# Altium PCB Test.PcbDoc
Units mm, origin at the board's own origin, x right, y up, seen from the top; angles counter-clockwise.
Board outline 152.4 x 101.6 mm, 2 copper layers (Top Layer, Bottom Layer); 91 components, 36 nets, 220 pads, 1 vias.
Unrouted connection lines stored in the file: 103.
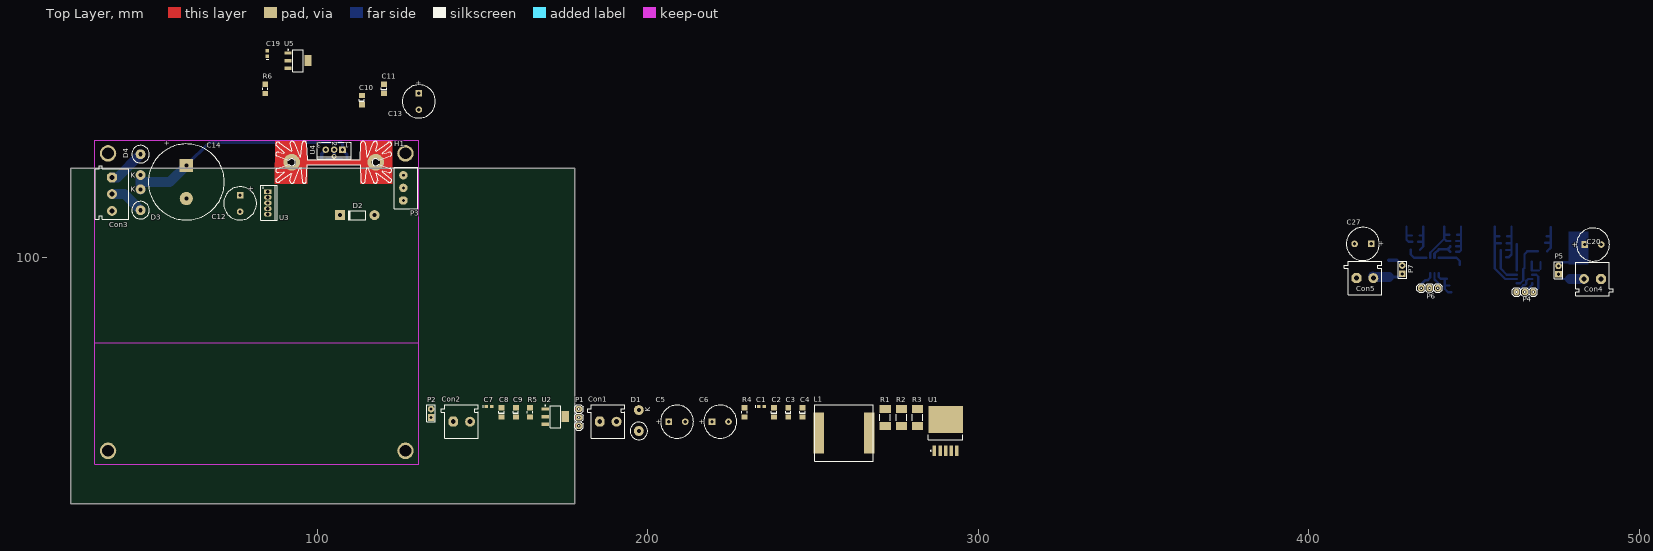
[diagram p0: Top Layer view]
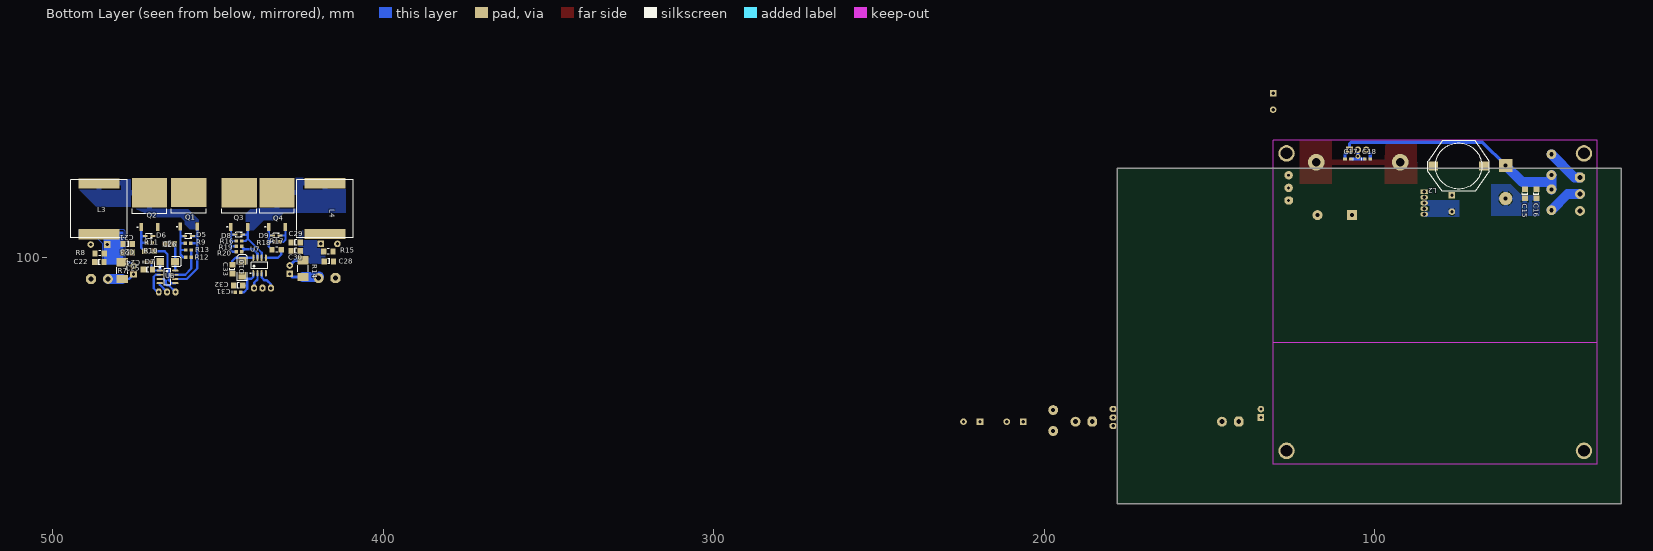
[diagram p1: Bottom Layer view, seen from below]

## Layer stack, top to bottom
Top Solder: solder mask 0.0102, Solder Resist, Dk 3.5
Top Layer: signal copper 0.0356
Dielectric 1: dielectric 0.32, FR-4, Dk 4.8
Bottom Layer: signal copper 0.0356
Bottom Solder: solder mask 0.0102, Solder Resist, Dk 3.5

## Board outline
25.4,25.4 177.8,25.4 177.8,127 25.4,127

## Design rules (kind name [scope] priority, off if disabled: settings)
Clearance "Polygon Clearance" [InPolygon AND (Not(OnLayer('Keep-Out Layer'))) vs All AND (Not(OnLayer('Keep-Out Layer')))] p1: gap=0.25
Clearance [All AND (Not(OnLayer('Keep-Out Layer'))) vs All AND (Not(OnLayer('Keep-Out Layer')))] p2: gap=0.16
ComponentClearance [All] p1 off: gap=0.5 collisioncheckmode=3 verticalgap=0.254 showdistances=TRUE
Height [All] p1: minheight=0 maxheight=80 prefheight=12.7
MinimumSolderMaskSliver SilkscreenOverComponentPads [All] p2: minsoldermaskwidth=0.254
PlaneConnect [All] p1: planeconnectstyle=Relief reliefexpansion=0.508 reliefentries=4 reliefconductorwidth=0.7 reliefairgap=0.6
PolygonConnect [All] p1: connectstyle=Relief reliefconductorwidth=1.5 reliefentries=4 polygonreliefangle="90 Angle" airgapwidth=0.3
RoomDefinition "Variable Output 2" [InComponentClass('Variable Output 2')] p1: confinementstyle=ConfineIn formatcopy=TRUE lockcomponents=FALSE outline 450.947,87.956 450.947,124.968 407.165,124.968 407.165,87.956
RoomDefinition "Variable Output 1" [InComponentClass('Variable Output 1')] p2: confinementstyle=ConfineIn formatcopy=TRUE lockcomponents=FALSE outline 452.247,88.011 495.173,88.011 495.173,124.714 452.247,124.714
RoomDefinition Regulators [InComponentClass('Regulators')] p3: confinementstyle=ConfineIn formatcopy=TRUE lockcomponents=FALSE outline 51.8,150.749 149.8,150.749 149.8,175.26 51.8,175.26
RoomDefinition "5V and 3V3 Outputs" [InComponentClass('5V and 3V3 Outputs')] p4: confinementstyle=ConfineIn formatcopy=TRUE lockcomponents=FALSE outline 152.019,77.851 314.96,77.851 314.96,97.917 152.019,97.917
RoutingVias [All] p1: holewidth=0.5 width=1.5 viastyle="Through Hole" minholewidth=0.3 minwidth=1 maxholewidth=1.25 maxwidth=3
SolderMaskExpansion [All] p1: expansion=0.102
Width [All] p1: maxlimit=8 minlimit=0.16 preferedwidth=1
27 further rules are at their usual default settings.

## Classes and differential pairs
component class "5V and 3V3 Outputs": C1 C2 C3 C4 C5 C6 C7 C8 C9 Con1 Con2 D1 L1 P1 P2 R1 R2 R3 R4 R5 U1 U2
component class Regulators: C10 C11 C12 C13 C14 C15 C16 C17 C18 C19 Con3 D2 D3 D4 H1 L2 P3 R6 U3 U4 U5
component class "Variable Output 1": C20 C21 C22 C23 C24 C25 C26 Con4 D5 D6 D7 L3 P4 P5 Q1 Q2 R7 R8 R9 R10 R11 R12 R13 U6
component class "Variable Output 2": C27 C28 C29 C30 C31 C32 C33 Con5 D8 D9 D10 L4 P6 P7 Q3 Q4 R14 R15 R16 R17 R18 R19 R20 U7

## Components (designator, comment, footprint, x,y, rotation, side; value= is the part's Value field where it differs from the comment)
C1 "C0603" 0603 234.315,54.864 r0 top
C2 "SMD" 1206 238.125,53.086 r90 top
C3 "SMD" 1206 242.443,53.086 r90 top
C4 "SMD" 1206 246.761,53.086 r90 top
C5 "220uF" CAPPR5-10X16 208.788,50.292 r0 top
C6 "470uF HF" CAPPR5-10X20 221.869,50.292 r0 top
C7 "C0603" 0603 151.892,54.864 r0 top
C8 "SMD" 1206 155.702,53.086 r90 top
C9 "SMD" 1206 160.02,53.086 r90 top
C10 "SMD" 1206 113.411,147.574 r90 top
C11 "SMD" 1206 120.142,151.003 r90 top
C12 "220uF" CAPPR5-10X16 76.581,116.332 r270 top
C13 "470uF HF" CAPPR5-10X20 130.683,147.193 r270 top
C14 "Generic Electrolytic Capacitor" "Capacitor 23x48 (DxH)" 60.325,122.809 r90 top
C15 "SMD" 1206 54.483,119.253 r90 bottom
C16 "SMD" 1206 51.054,119.253 r90 bottom
C17 "C0603" 0603 108.077,129.794 r0 bottom
C18 "C0603" 0603 102.108,129.794 r180 bottom
C19 "C0603" 0603 84.836,161.671 r90 top
C20 "50V" CAPPR5-10X20 485.934,103.886 r0 top
C21 "SMD" 1206 477.266,104.013 r0 bottom
C22 "SMD" 1206 485.807,98.552 r180 bottom
C23 "SMD" 1206 477.266,101.473 r0 bottom
C24 "C0603" 0603 470.916,98.552 r180 bottom
C25 "SMD" 1206 471.17,96.266 r180 bottom
C26 "SMD" 1206 464.566,104.013 r180 bottom
C27 "50V" CAPPR5-10X20 416.306,104.085 r180 top
C28 "SMD" 1206 416.403,98.815 r0 bottom
C29 "SMD" 1206 426.466,104.521 r180 bottom
C30 "SMD" 1206 426.466,101.981 r180 bottom
C31 "C0603" 0603 443.865,89.48 r180 bottom
C32 "SMD" 1206 443.865,91.512 r180 bottom
C33 "SMD" 1206 445.613,96.405 r90 bottom
Con1 "Salida Buck" My_CN2 182.88,55.372 r0 top
Con2 "Salida Buck" My_CN2 138.557,55.372 r0 top
Con3 "AC Input" My_CN3 42.926,126.746 r270 top
Con4 "Salida Buck" My_CN2 490.855,88.392 r180 top
Con5 "Salida Buck" My_CN2 411.861,98.806 r0 top
D1 "1N5822" "Vertical DO-201AD" 197.231,50.292 r90 top
D2 "1N5817" DO-41 112.014,112.776 r180 top
D3 "1N5408" "Vertical DO-201AD" 46.482,117.094 r90 top
D4 "1N5408" "Vertical DO-201AD" 46.482,128.397 r270 top
D5 "15V Zener" SOD323 458.851,106.426 r180 bottom
D6 "15V Zener" SOD323 470.789,106.426 r180 bottom
D7 "MBRS1100T3G" SMB 465.201,98.679 r180 bottom
D8 "15V Zener" SOD323 443.614,106.879 r180 bottom
D9 "15V Zener" SOD323 432.311,106.625 r180 bottom
D10 "MBRS1100T3G" SMB 442.565,96.659 r90 bottom
H1 "Heat sink TO22" My_Heat_sink_TO22 104.902,129.54 r0 top
L1 "Ferrite Inductor" "SRP1770TA Series" 259.334,46.863 r0 top
L2 "SMTDR1206" "SMTDR1206 Inductor" 74.549,127.635 r180 bottom
L3 "Ferrite Inductor" "SRP1770TA Series" 485.934,114.681 r270 bottom
L4 "Ferrite Inductor" "SRP1770TA Series" 417.576,114.753 r270 bottom
P1 "Header 3" My_1X03 179.07,51.562 r90 top
P2 "Header 2" HDR1X2 134.366,51.562 r90 top
P3 "XY2500R-F 3P" OSTOQ033250 125.984,121.031 r90 top
P4 "Header 3" My_1X03 465.328,89.535 r180 top
P5 "Header 2" HDR1X2 475.488,94.869 r90 top
P6 "Header 3" My_1X03 436.469,90.69 r180 top
P7 "Header 2" HDR1X2 428.244,94.996 r90 top
Q1 "SUM110P06" D2PAK_N 458.756,116.078 r90 bottom
Q2 "SUM110P06" D2PAK_N 470.662,115.951 r90 bottom
Q3 "SUM110P06" D2PAK_N 443.487,116.023 r90 bottom
Q4 "SUM110P06" D2PAK_N 432.057,116.023 r90 bottom
R1 "ERJL1W" L1W-2512 271.78,51.562 r90 top
R2 "ERJL1W" L1W-2512 276.733,51.562 r90 top
R3 "ERJL1W" L1W-2512 281.559,51.562 r90 top
R4 "SMD" 8RB-1206 229.235,53.086 r90 top
R5 "SMD" 8RB-1206 164.338,53.086 r90 top
R6 "SMD" 8RB-1206 84.201,151.003 r90 top
R7 "ERJL1W" L1W-2512 478.917,96.012 r270 bottom
R8 "SMD" 8RB-1206 485.775,101.219 r180 bottom
R9 "10K" ERA-0603 458.978,104.267 r180 bottom
R10 "SMD 1206" 8RB-1206 470.662,101.854 r180 bottom
R11 "10K" ERA-0603 470.662,104.394 r0 bottom
R12 "10" ERA-0603 458.851,100.076 r0 bottom
R13 "10" ERA-0603 458.851,102.235 r0 bottom
R14 "ERJL1W" L1W-2512 424.18,96.592 r270 bottom
R15 "SMD" 8RB-1206 416.53,101.736 r0 bottom
R16 "10K" ERA-0603 443.614,104.978 r180 bottom
R17 "SMD 1206" 8RB-1206 432.184,102.307 r180 bottom
R18 "10K" ERA-0603 432.184,104.72 r0 bottom
R19 "10" ERA-0603 443.614,103.325 r0 bottom
R20 "10" ERA-0603 443.614,101.672 r0 bottom
U1 "LM2576S-5.0" TS5B_N 290.068,47.498 r90 top
U2 "TC1262-3.3VDB" SOT-223-DB3_N 171.958,51.816 r0 top
U3 "LM2575T-5.0" T05A 84.963,116.459 r270 top
U4 "MC7815ACT" 221A-04 105.029,132.588 r180 top
U5 "TC1262-3.3VDB" SOT-223-DB3_N 94.107,159.512 r0 top
U6 "IRS21867S" SOIC8 465.201,94.107 r180 bottom
U7 "IRS21867S" SOIC8 437.358,97.548 r90 bottom

## Footprints (in the part's own frame and the unit in brackets; to place one, negate y for a bottom-side part, rotate by r counter-clockwise, add the part's x,y. Pads: shape width x height; smd on the part's side, far side on the other; paste and mask are expansions set on the pad)
8RB-1206 [mm] "Chip Resistor; Body 3.2 x 1.6 mm (LxW typ)"
  rect 1.6x1.8 smd: 1(-1.4,0) 2(1.4,0)
  silkscreen extent -0.3,-0.8 0.3,0.8
221A-04 [mm] "TO, Thru-Hole, Vertical, Heatsink Mounted; 3 In-Line Leads; Pitch 2.54 mm"
  rect 2x2 hole 1: 1(-2.54,0)
  round 2 hole 1: 2(0,0) 3(2.54,0)
  silkscreen extent -5.15,-2.2 5.15,2.7
0603 [mm] "Chip Capacitor; Body 1.6 x 0.8 mm (LxW typ)"
  rect 1.1x1 smd: 1(-0.85,0) 2(0.85,0)
  silkscreen extent -1.7,-0.4 -1.7,0.4
1206 [mm] "Chip Capacitor; Body 3.2 x 1.6 mm (LxW typ)"
  rect 1.6x1.8 smd: 1(-1.4,0) 2(1.4,0)
  silkscreen extent -0.3,-0.8 0.3,0.8
"Capacitor 23x48 (DxH)" [mm] "Electrolytic Capacitor 23x48 (DxH)"
  rect 4x4 hole 1.25: 1(5,0)
  round 4 hole 1.25: 2(-5,0)
  silkscreen extent -11.5,-11.5 11.5,11.5
CAPPR5-10X16 [mm] "Capacitor, Electrolytic, Radial; Body 10 x 16 mm (Dia.xH typ); Pin Spacing 5 mm (typ)"
  rect 2x2 hole 1: 1(-2.5,0)
  round 2 hole 1: 2(2.5,0)
  silkscreen extent -5,-5 5,5
CAPPR5-10X20 [mm] "Capacitor, Electrolytic, Radial; Body 10 x 20 mm (Dia.xH typ); Pin Spacing 5 mm (typ)"
  rect 2x2 hole 1: 1(-2.5,0)
  round 2 hole 1: 2(2.5,0)
  silkscreen extent -5,-5 5,5
D2PAK_N [mm] "D2-PAK, 4-Leads, Body 8.8x10.4mm, Pitch 2.54mm, Lead Span 15.1mm, IPC Medium Density"
  rect 2.4x1.05 smd: 1(-6.8,2.54) 3(-6.8,-2.54)
  rect 8.9x10.65 smd: 2(3.55,0)
  silkscreen extent -6.92,-5.25 -1.3,5.25, body extent -2.7,-5.28 6.3,5.28, height 4.69
DO-41 [mm] "Diode, Axial; Body 5.2 x 2.7 mm (LxDia. max), Lead Dia. 0.86 mm (max)"
  round 3 hole 1.25: 1(-5.23,0)
  rect 3x3 hole 1.25: 2(5.23,0)
  silkscreen extent -2.65,-1.4 2.75,1.4
ERA-0603 [mm] "Chip Resistor; Body 1.6 x 0.8 mm (LxW typ)"
  rect 1.1x1 smd: 1(-0.85,0) 2(0.85,0)
HDR1X2 [mm] "Connector; Header; 2 Position"
  rect 2x2 hole 1: 1(0,0)
  round 2 hole 1: 2(2.54,0)
  silkscreen extent -1.27,-1.27 3.81,1.27
L1W-2512 [mm] "Chip Resistor; Body 6.4 x 3.2 mm (LxW typ)"
  rect 2.5x3.4 smd: 1(-2.55,0) 2(2.55,0)
  silkscreen extent -1,-1.6 1,1.6
My_1X03 [mm]
  oct 1.8x2.1 hole 1: 1(-2.54,0) 2(0,0) 3(2.54,0)
  silkscreen extent -3.81,-1.27 3.81,1.27
My_CN2 [mm]
  oct 3x3 hole 1.5: 1(2.527,-5.093)
  round 3 hole 1.5: 2(7.607,-5.093)
  silkscreen extent -1.14,-10.17 10.16,-0.01
My_CN3 [mm]
  oct 3x3 hole 1.5: 1(2.527,-5.093)
  round 3 hole 1.5: 2(7.607,-5.093) 3(12.687,-5.093)
  silkscreen extent -1.02,-10.17 15.23,-0.01
My_Heat_sink_TO22 [mil]
  round 200 hole 100: A2,5(-500,-30) B2,5(500,-30)
  Top Layer region: 700,225 315,225 315,0 -315,0 -325,225 -695,220 -700,-285 -315,-285 -315,-60 315,-60 315,-285 695,-285
  silkscreen extent -690,-280 690,220
OSTOQ033250 [mm] "TERM BLOCK HDR 3POS VERT 3.81MM"
  oct 2.54x2.54 hole 0.85: 1(-3.81,0)
  round 2.54 hole 0.85: 2(0,0) 3(3.81,0)
  silkscreen extent -6.26,-4.4 6.26,2.8
SMB [mm] "DO-214-AA/SMB; 2 C-Bend Leads; Body 5.3 x 3.6 mm, inc. leads (LxW)"
  rect 2.3x2.3 smd: 1(-2.25,0) 2(2.25,0)
  silkscreen extent -3.8,-1.55 4.1,1.55
"SMTDR1206 Inductor" [mm] "SMTDR1206 Inductor"
  rect 2.92x2.79 smd: 1(-7.685,0) 2(7.685,0)
  silkscreen extent -9.27,-7.62 9.27,7.62
SOD323 [mm] "SOD-323/SC-76; 2 Leads; Body 1.7 x 1.3 mm, (LxW)"
  rect 1.45x0.55 smd: 1(1.175,0) 2(-1.175,0)
  silkscreen extent -0.95,-0.75 0.95,0.75
SOIC8 [mm] "SOIC, 8-Leads, Body 4.9x3.9mm, Pitch 1.27mm, IPC High Density"
  oval 1.9x0.6 smd: 1(-2.35,1.905) 2(-2.35,0.635) 3(-2.35,-0.635) 4(-2.35,-1.905) 5(2.35,-1.905) 6(2.35,-0.635) 7(2.35,0.635) 8(2.35,1.905)
  silkscreen extent -2.48,-2.5 1,2.88, body extent -2,-2.5 2,2.5, height 1.75
SOT-223-DB3_N [mm] "SOT223, 4-Leads, Body 6.5x3.5mm, Pitch 2.3mm, Lead Span 7mm, IPC Medium Density"
  rect 2.2x1 smd: 1(-3,2.3) 2(-3,0) 3(-3,-2.3)
  rect 2.2x3.3 smd: 4(3,0)
  silkscreen extent -3.12,-3.35 1.6,3.47, body extent -1.85,-3.35 1.85,3.35, height 1.8
"SRP1770TA Series" [mm] "Shielded Wirewound Inductor"
  rect 3.15x12.5 smd: 1(-7.675,0) 2(7.675,0)
  silkscreen extent -8.8,-8.5 8.8,8.5
T05A [mm] "TO, Thru-Hole, Vertical, Heatsink Mounted; 5 In-Line Leads; Pitch 1.70 mm"
  rect 1.4x2.3 hole 1: 1(-3.4,0)
  oval 1.4x2.3 hole 1: 2(-1.7,0) 3(0,0) 4(1.7,0) 5(3.4,0)
  silkscreen extent -5.3,-2.1 5.3,2.8, body extent -5.35,-2.15 5.35,2.85, height 19.6
TS5B_N [mm] "D2-PAK, 6-Leads, Body 8.6x10.2mm, Pitch 1.7mm, Lead Span 14.1mm, IPC Medium Density"
  rect 3.2x1.05 smd: 1(-6,3.4) 2(-6,1.7) 3(-6,0) 4(-6,-1.7) 5(-6,-3.4)
  rect 8.3x10.45 smd: 6(3.45,0)
  silkscreen extent -6.12,-5.2 -1.1,5.2, body extent -2.65,-5.2 6.24,5.2, height 4.65
"Vertical DO-201AD" [mm] "Vertical DO-201AD"
  round 3 hole 1.25: 1(-2.816,0) 2(3.5,0)
  silkscreen extent -5.47,-2.65 -0.17,2.65

## Part data
C1 C7 C17 C18 C19 C24 C31: "C1608X7R1C105K X7R"
C2 C3 C4 C8 C9 C10 C11 C15 C16 C21 C22 C23 C25 C26 C28 C29 C30 C32 C33: library part C1206, "Ceramic Chip Capacitor - Standard"
C5 C12: library part EKA00DD322J00, "Aluminum Electrolytic Capacitor, Radial Style with Long Leads: 220uF, 63V"
C6 C13: library part EKC00DE347E00, "Aluminum Electrolytic Capacitor, Radial Style with Long Leads: 470uF, 25V"
C20 C27: library part EKB00DE347H00, "Aluminum Electrolytic Capacitor, Radial Style with Long Leads: 470uF, 50V"
Con1 Con2 Con4 Con5: library part "CON2 pin blue", "Connector blue screw"
Con3: library part "CON3 pin Green", "Connector green screw"
D1 D7 D10: library part "Generic Schottky Diode", "Generic Schottky Diode"
D2: library part 1N6095, "Schottky Rectifier"
D3 D4: library part "Diode 1N5408", "3 Amp Medium Power Silicon Rectifier Diode"
D5 D6 D8 D9: library part "D Zener", "Zener Diode"
H1: "Heat sink for TO22"
L2: library part "Ferrite Inductor", "Ferrite Inductor"
P1 P4 P6: "Header, 3-Pin"
P2 P5 P7: "Header, 2-Pin"
P3: "HEADER 3P P/CI 90gra VERDE P=3.81MM XY2500R-F"
Q1 Q2 Q3 Q4: library part IRF540NS, "HEXFET Power MOSFET"
R1 R2 R3 R7 R14: "Low Ohmic Value Thick Film Chip Resistor, 40m Ohm to 100m Ohm Range, 1% and 5% Tolerance, 2512 Size, 1 W"
R4 R5 R6 R8 R10 R15 R17: library part ERJ8BQ, "Low Ohmic Value Thick Film Chip Resistor, 0.22 Ohm to 9.1 Ohm Range, 1%, 2% and 5% Tolerance, 1206 Size, 0.33 W"
R9 R11 R12 R13 R16 R18 R19 R20: library part ERA3Y, "Rectangular Thick Film Chip Resistor, 10 Ohm to 330k Ohm Range, 0.1% and 0.5% Tolerance, 0603 Size, 0.063 W"
U1: "SIMPLE SWITCHER® 3A Step-Down Voltage Regulator, 5-pin TO-263"
U2 U5: "500mA Fixed Output CMOS LDO, 3-Pin SOT-223, Extended Temperature"
U3: "SIMPLE SWITCHER® 1A Step-Down Voltage Regulator, 5-pin TO-220"
U4: "3-Terminal Positive Fixed Voltage Regulator"
U6 U7: "Half-Bridge Gate Driver IC Inverting 8-SOIC"

## Free pads (board coordinates)
  round 5 hole 3.5: 0(36.623,41.449) 0(36.623,41.449) 0(36.623,131.449) 0(126.623,41.449) 0(126.623,131.449)

## Via types
v1: diameter 1.5, hole 0.75, Top Layer to Bottom Layer, 1 vias

## Nets (pads, with @x,y where several pads share a name; then routed paths per layer and width w, separated by ;. In a path a pad name is that pad's centre, name@x,y a point inside that pad or via, vN(x,y) a via of type N, cw(c..) or ccw(c..) an arc to the next point about the centre after c; other vN are vias at no path point)
3V3_SENSE_NEG: Con2.2 P2.1 R5.2
3V3_SENSE_POS: C7.2 C8.2 C9.2 P2.2 R5.1 U2.3
5V_CTRL: P1.2 U1.5
5V_SENSE_NEG: Con1.2 P1.1 R3.2
5V_SENSE_POS: C1.2 C2.2 C3.2 C4.2 C6.1 L1.2 P1.3 R1.1 R4.2 U1.4 U2.1
+3V3: C19.2 P3.1 U5.3
+5V: C10.2 C11.2 C13.1 L2.2 P3.3 R6.2 U3.4 U5.1
+15V: C18.2 C24.2 C25.2 C31.2 C32.2 D7.1 D10.1 U4.3 U6.1 U7.1 | length 20
  Bottom Layer w0.7: U7.1 439.263,94.082 439.801,93.544 D10.1@441.7,93.544 ; 441.071,93.29 441.071,90.496 442.087,89.48 C31.2 ; 441.198,91.512 C32.2 ; U6.1@467.451,96.112 D7.1 ; U6.1 C25.2@469.516,96.012 ; C25.2@470.066,96.562 C24.2
  Bottom Layer w1: C18.2 101.258,131.357 U4.3
+30V: C5.1 C12.1 C14.1 C15.2 C16.2 C17.2 D3.2 D4.2 Q1.2 Q3.2 U1.1 U3.1 U4.1 | length 75.7
  Bottom Layer w1: C14.1 67.365,134.849 107.086,134.849 107.569,134.366 U4.1 108.927,131.23 C17.2
  Bottom Layer w3: D3.2 46.482,122.745 ; D4.2 46.482,122.745 ; C14.1 55.261,122.745 46.482,122.745
GATE1_BUCK1_PIC: P4.1 U6.2 | length 8
  Bottom Layer w0.7: P4.1@467.36,89.662 468.376,89.662 469.392,90.678 469.392,94.107 468.757,94.742 U6.2
GATE1_BUCK2_PIC: P6.1 U7.2 | length 4.9
  Bottom Layer w0.7: U7.2 437.993,93.32 439.009,92.304 P6.1
GATE2_BUCK1_PIC: P4.3 U6.3 | length 6.9
  Bottom Layer w0.7: P4.3 464.82,91.567 465.328,91.567 465.709,91.948 465.709,92.837 466.344,93.472 U6.3
GATE2_BUCK2_PIC: P6.3 U7.3 | length 6.1
  Bottom Layer w0.7: P6.3 433.929,91.863 435.102,93.036 435.864,93.036 436.723,93.895 U7.3
GND: C1.1 C2.1 C3.1 C4.1 C5.2 C6.2 C7.1 C8.1 C9.1 C10.1 C11.1 C12.2 C13.2 C14.2 C15.1 C16.1 C17.1 C18.1 C19.1 C20.2 C21.1 C22.1 C23.1 C24.1 C25.1 C26.1 C27.2 C28.1 C29.1 C30.1 C31.1 C32.1 C33.1 Con1.1 Con2.1 Con3.3 Con4.1 Con5.1 D1.1 D2.1 D6.1 D9.1 P3.2 P4.2 P6.2 Q2.3 Q4.3 R4.1 R6.1 R8.1 R11.1 R15.1 R18.1 U1.3 U1.6 U2.2 U2.4 U3.3 U3.5 U4.2 U5.2 U5.4 U6.4 U7.4 | length 18.2
  Bottom Layer w0.7: Q4.3 429.517,106.625 ; D9.1 429.517,106.625 ; R18.1 430.149,104.72 429.517,105.352 429.517,106.625 ; P4.2 467.551,91.758 U6.4
  Bottom Layer w1: C18.1 C17.1 ; v1@105.029,129.857 U4.2
  other v1: 105.029,130.556
NetC26_2: C26.2 D7.2 U6.8 | length 7.9
  Bottom Layer w0.7: U6.8 C26.2@462.851,103.952
NetC33_2: C33.2 D10.2 U7.8 | length 7.9
  Bottom Layer w0.7: U7.8 444.623,99.898 445.613,98.908 C33.2
NetCon3_1: Con3.1 D4.1 | length 11.5
  Bottom Layer w3: Con3.1 39.488,124.219 D4.1
NetCon3_2: Con3.2 D3.1 | length 10.7
  Bottom Layer w3: Con3.2 41.621,119.139 D3.1
NetD1_2: D1.2 L1.1 U1.2
NetD2_2: D2.2 L2.1 U3.2
NetD5_1: D5.1 L3.1 Q1.3 Q2.2 R9.2 U6.6 | length 23.6
  Bottom Layer w0.7: Q1.3 456.216,96.615 459.359,93.472 U6.6 ; 456.343,106.426 D5.1 ; 456.47,104.267 R9.2
NetD5_2: D5.2 Q1.1 R9.1 R12.2 R13.2 | length 14.5
  Bottom Layer w0.7: R12.2 460.502,100.076 461.296,100.87 461.296,104.267 ; R13.2 461.169,102.235 ; R9.1 461.296,104.267 ; D5.2 461.296,106.426 ; Q1.1 461.296,106.426 ; 461.296,104.267 461.296,106.426
NetD6_2: D6.2 Q2.1 R10.1 R11.2 | length 10.4
  Bottom Layer w0.7: R11.2 473.075,104.394 ; D6.2 473.075,106.426 ; R10.1 473.202,102.994 Q2.1
NetD8_1: D8.1 L4.1 Q3.3 Q4.2 R16.2 U7.6 | length 14.5
  Bottom Layer w0.7: U7.6 436.723,101.388 440.947,105.612 ; Q3.3 440.947,105.612 ; 441.074,106.879 D8.1 ; R16.2 441.581,104.978 440.947,105.612
NetD8_2: D8.2 Q3.1 R16.1 R19.2 R20.2 | length 12.8
  Bottom Layer w0.7: R20.2 445.516,101.672 446.027,102.183 Q3.1 ; R19.2 445.898,103.325 ; R16.1 445.904,104.978 ; D8.2 445.9,106.879
NetD9_2: D9.2 Q4.1 R17.1 R18.2 | length 9.9
  Bottom Layer w0.7: R18.2 434.47,104.72 ; D9.2 434.597,106.625 ; R17.1 434.597,103.32 434.597,106.625 ; Q4.1 434.597,106.625
NetR1_2: R1.2 R2.1
NetR2_2: R2.2 R3.1
NetR10_2: R10.2 U6.5 | length 14.8
  Bottom Layer w0.7: U6.5 463.931,92.202 464.82,93.091 464.82,96.393 465.201,96.774 465.201,100.965 466.09,101.854 R10.2
NetR12_1: R12.1 R13.1 U6.7 | length 11.2
  Bottom Layer w0.7: R13.1 R12.1 458.001,96.608 459.867,94.742 U6.7
NetR17_2: R17.2 U7.5 | length 6.5
  Bottom Layer w0.7: R17.2 430.784,100.91 431.796,99.898 U7.5
NetR19_1: R19.1 R20.1 U7.7 | length 8.1
  Bottom Layer w0.8: U7.7 437.993,101.134 439.293,102.434 442.002,102.434 ; R20.1 442.002,102.434 ; R19.1 442.002,102.563 442.002,102.434
OUT1_SENSE_NEG: Con4.2 P5.1 R7.2 | length 8.3
  Bottom Layer w0.7: P5.1 476.895,93.462 R7.2
  Bottom Layer w3: R7.2@478.94,93.485 Con4.2
OUT1_SENSE_POS: C20.1 C21.2 C22.2 C23.2 L3.2 P5.2 R7.1 R8.2 | length 3.9
  Bottom Layer w0.7: P5.2 476.641,98.562 R7.1
OUT2_SENSE_NEG: Con5.2 P7.1 R14.2 | length 9.4
  Bottom Layer w1: R14.2 427.29,94.042 P7.1
  Bottom Layer w3: Con5.2@419.311,94.23 419.5,94.042 R14.2
OUT2_SENSE_POS: C27.1 C28.2 C29.2 C30.2 L4.2 P7.2 R14.1 R15.2 | length 4.7
  Bottom Layer w1: R14.1 426.638,99.142 P7.2
pads on no net: H1.A2,5 H1.B2,5

## Polygon pours and split planes (outlines as drawn)
NetD5_1 on Bottom Layer "Bottom Layer-No Net 1" (solid, pour order 10): 455.93,108.458 458.47,108.458 459.867,109.855 459.994,109.982 459.994,110.871 459.994,110.998 461.01,112.014 461.137,112.141 469.265,112.141 476.123,115.316 482.6,115.316 486.791,115.316 492.252,120.777 492.379,120.904 492.379,123.571 465.582,123.571 465.455,123.444 465.455,114.554 458.978,114.554 455.803,111.379
OUT1_SENSE_POS on Bottom Layer "Bottom Layer-No Net 1" (solid, pour order 8): 478.409,97.917 484.759,97.917 484.759,104.14 486.41,105.791 486.537,105.918 491.871,105.918 491.871,108.331 491.744,108.458 478.409,108.458 478.409,108.331 478.155,108.077 478.155,98.298
OUT2_SENSE_POS on Bottom Layer "Bottom Layer-No Net 1" (solid, pour order 6): 417.449,108.712 417.449,98.044 425.45,98.044 425.45,106.934 423.672,108.712
NetD8_1 on Bottom Layer "Bottom Layer-No Net 1" (solid, pour order 4): 441.452,108.149 441.579,108.276 441.579,113.356 441.452,113.356 440.309,114.499 440.182,114.626 438.023,114.626 438.023,114.753 437.261,115.515 437.134,115.642 437.134,124.151 411.607,124.151 411.353,123.897 411.353,113.483 430.022,113.483 432.181,111.324 432.308,111.197 436.245,111.197 436.245,111.07 438.912,108.403 439.166,108.149 440.947,108.149
no net on Bottom Layer "Bottom Layer-No Net" (solid, pour order 30): 84.963,115.697 83.312,115.697 83.312,113.792 86.233,113.792 86.233,112.268 74.422,112.268 74.422,117.221 86.233,117.221 86.233,115.697
no net on Bottom Layer "Bottom Layer-No Net" (solid, pour order 35): 50.038,118.745 55.372,118.745 58.293,121.666 58.801,122.174 64.643,122.174 64.643,112.649 50.038,112.649

## Keep-outs
Keep-Out Layer:
  lines w0.2: 32.623,37.449 32.623,135.449 130.623,135.449 130.623,37.449 32.623,37.449
  lines w0.254: 32.623,74.114 130.623,74.114

## Other copper
Bottom Layer:
  rectangle net OUT1_SENSE_POS: 478.536,97.917 484.505,107.823

## Dimensions
7.858,18.526 to 105.858,18.526 on Mechanical 1
7.858,18.526 to 7.858,116.526 on Mechanical 1

## Text inside footprints (layer, text, board x,y; h text height)
C5: Top Overlay "+" at 202.313,49.542 h1.5
C6: Top Overlay "+" at 215.394,49.542 h1.5
C12: Top Overlay "+" at 79.248,121.666 h1.5 r270
C13: Top Overlay "+" at 129.933,153.668 h1.5 r270
C14: Top Overlay "+" at 55.118,133.604 h1.52 r90
C20: Top Overlay "+" at 479.459,103.136 h1.5
C27: Top Overlay "+" at 422.781,104.835 h1.5 r180
D1: Top Overlay "K" at 200.731,53.34 h1.52 r90
D3: Top Overlay "K" at 43.434,119.888 h1.52
D4: Top Overlay "K" at 43.434,124.079 h1.52
H1: Mechanical 2 "2,5" at 116.332,125.73 h1.27; Mechanical 2 "2,5" at 90.297,125.73 h1.27
U4: Top Overlay "3" at 101.092,134.747 h1.5 r180; Top Overlay "2" at 104.394,135.001 h1.5 r270; Top Overlay "1" at 109.601,134.747 h1.5 r180